# Altium PCB STM32F4VE.PcbDoc
Units mm, origin at the board's own origin, x right, y up, seen from the top; angles counter-clockwise.
Board outline 99 x 95.5 mm, 2 copper layers (Top Layer, Bottom Layer); 103 components, 124 nets, 470 pads, 0 vias.
Unrouted connection lines stored in the file: 314.
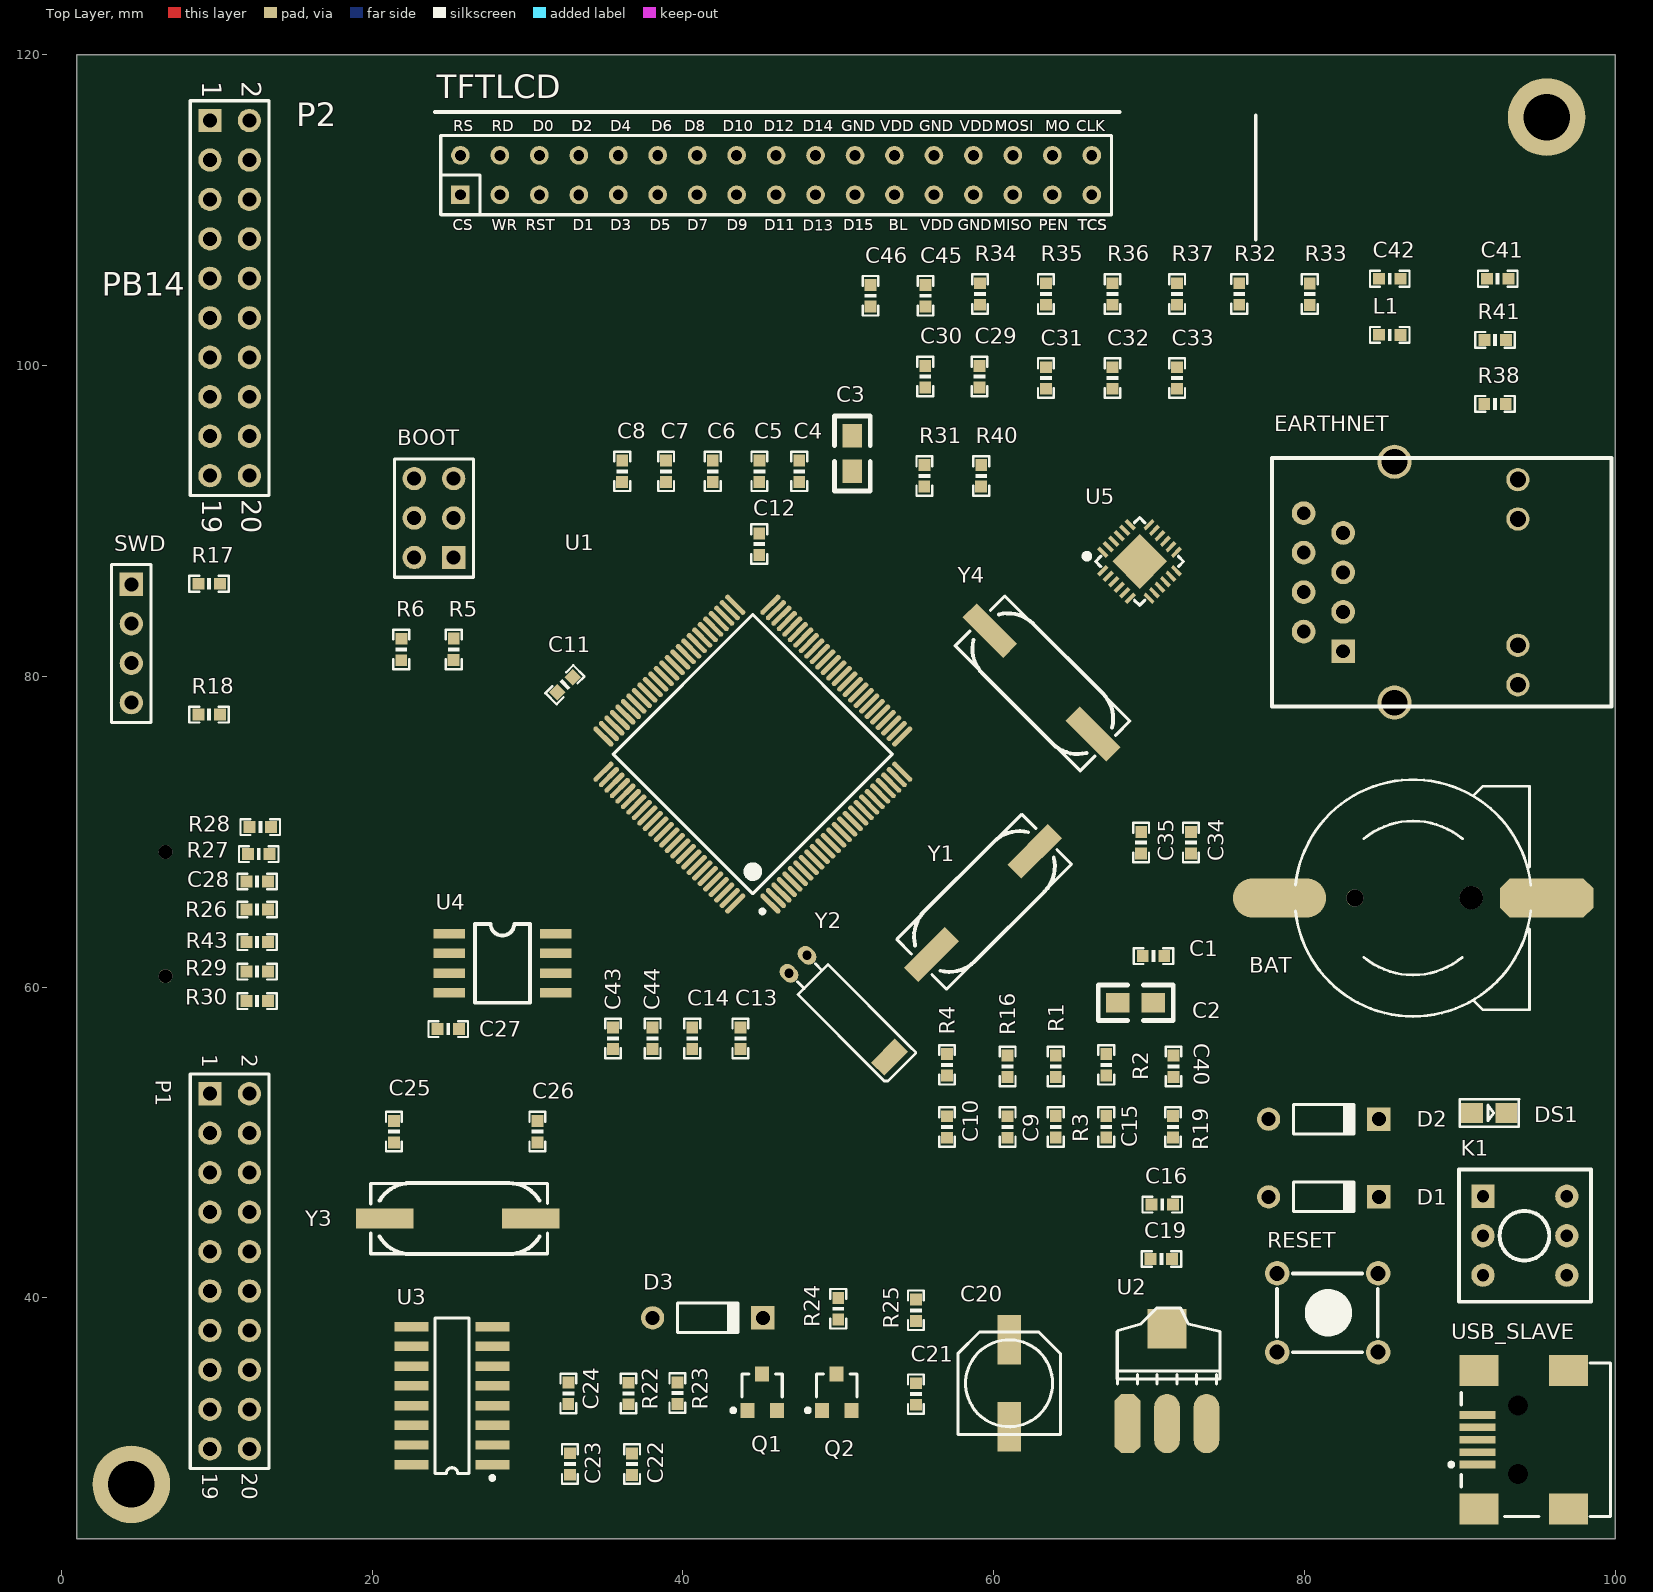
[diagram p0: Top Layer view]
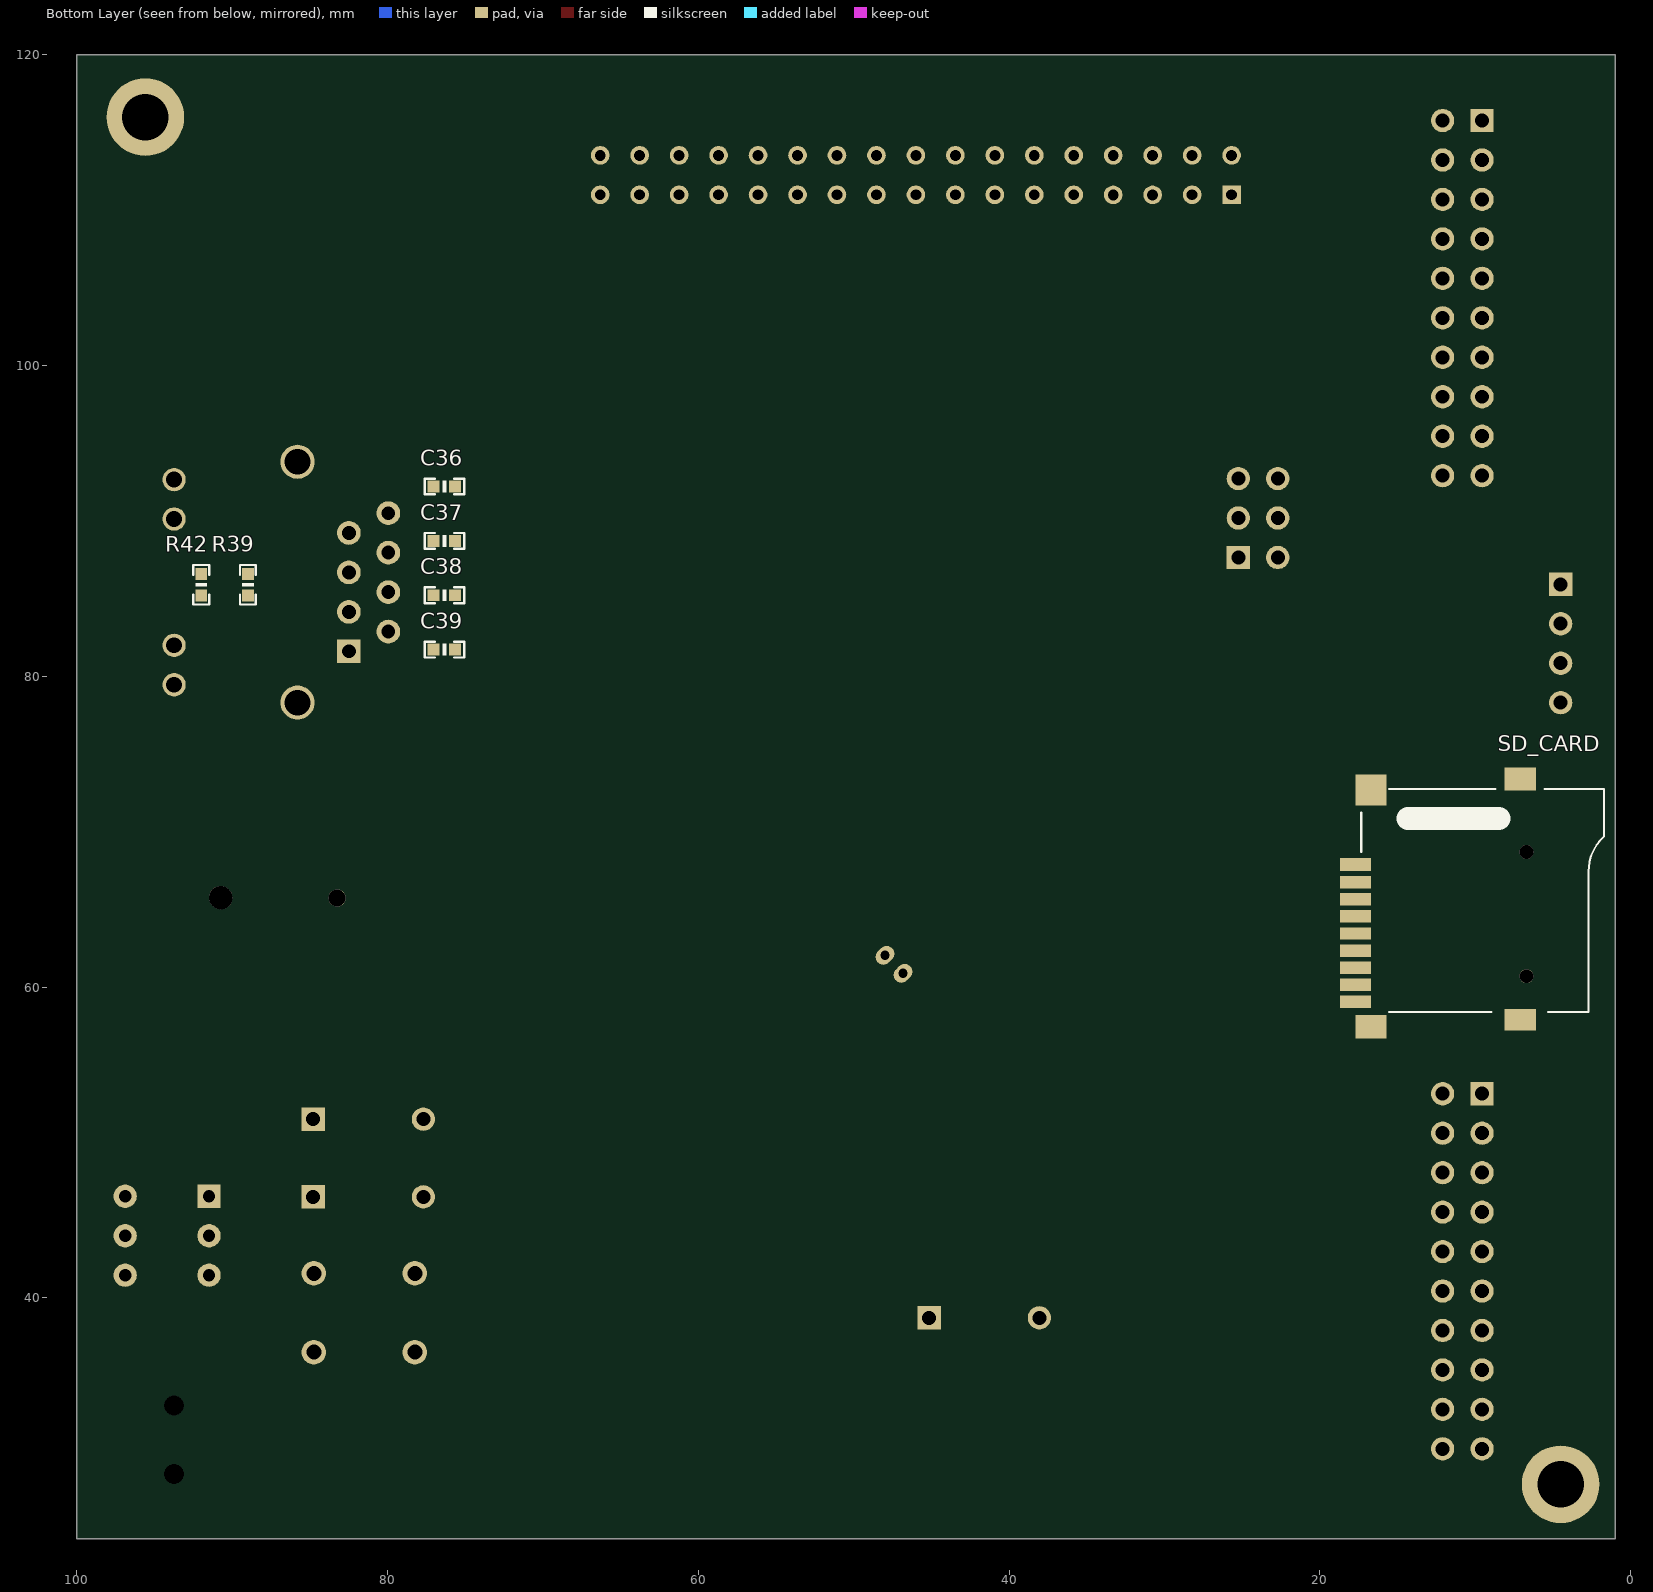
[diagram p1: Bottom Layer view, seen from below]

## Layer stack, top to bottom
Top Solder: solder mask 0.0102, Solder Resist, Dk 3.5
Top Layer: signal copper 0.0356
Dielectric 1: dielectric 0.32, FR-4, Dk 4.8
Bottom Layer: signal copper 0.0356
Bottom Solder: solder mask 0.0102, Solder Resist, Dk 3.5

## Board outline
1,24.5 100,24.5 100,120 1,120

## Design rules (kind name [scope] priority, off if disabled: settings)
Clearance [All] p1: gap=0.152 ignorepadtopadclearanceinfootprint=TRUE
HoleSize [All] p1: absolutevalues=TRUE maxlimit=2.54 minlimit=0.2 maxpercent=80.000 minpercent=20.000
PolygonConnect [All] p1: connectstyle=Relief reliefconductorwidth=0.254 reliefentries=4 polygonreliefangle="90 Angle" airgapwidth=0.254
RoutingVias [All] p1: holewidth=0.4 width=0.635 viastyle="Through Hole" minholewidth=0.3 minwidth=0.5 maxholewidth=0.711 maxwidth=1.27
SolderMaskExpansion [All] p1: expansion=0.102
UnRoutedNet [All] p1: checkbadconnections=TRUE
Width [All] p1: maxlimit=0.7 minlimit=0.127 preferedwidth=0.254
28 further rules are at their usual default settings.

## Components (designator, comment, footprint, x,y, rotation, side; value= is the part's Value field where it differs from the comment)
BAT "BATT" BATM 87,65.737 r90 top
BOOT "Header 3X2" HDR2X3 25.247,87.656 r90 top
C1 "104" 0603P 70.286,62 r0 top
C2 "106" 0805 68,59 r0 top
C3 "106" 0805 50.909,93.2 r90 top
C4 "104" 0603P 47.487,93.2 r90 top
C5 "104" 0603P 44.921,93.2 r90 top
C6 "104" 0603P 41.921,93.2 r90 top
C7 "104" 0603P 38.921,93.2 r90 top
C8 "104" 0603P 36.093,93.2 r90 top
C9 "22P" 0603P 60.902,51 r270 top
C10 "22P" 0603P 57.002,51 r270 top
C11 "106" 0603P 32.409,79.466 r45 top
C12 "106" 0603P 44.921,88.514 r270 top
C13 "12P" 0603P 43.7,56.7 r90 top
C14 "12P" 0603P 40.6,56.7 r90 top
C15 "104" 0603P 67.251,51 r90 top
C16 "104" 0603P 70.855,46 r0 top
C19 "104" 0603P 70.807,42.5 r180 top
C20 "220uF" CC6.56.5 61,34.5 r270 top
C21 "104" 0603P 55,33.8 r90 top
C22 "104" 0603P 36.731,29.3 r270 top
C23 "10UF" 0603P 32.728,29.3 r90 top
C24 "104" 0603P 32.626,33.85 r90 top
C25 "22P" 0603P 21.4,50.7 r270 top
C26 "22P" 0603P 30.637,50.7 r270 top
C27 "104" 0603P 24.9,57.3 r180 top
C28 "104" 0603P 12.6,66.8 r0 top
C29 "104" 0603P 59.097,99.3 r270 top
C30 "10UF" 0603P 55.598,99.3 r270 top
C31 "104" 0603P 63.367,99.2 r90 top
C32 "104" 0603P 67.65,99.2 r90 top
C33 "104" 0603P 71.811,99.2 r90 top
C34 "22P" 0603P 72.7,69.3 r270 top
C35 "22P" 0603P 69.5,69.3 r270 top
C36 "10" 0603P 76.346,92.222 r0 bottom
C37 "10" 0603P 76.346,88.722 r0 bottom
C38 "10" 0603P 76.346,85.222 r0 bottom
C39 "10" 0603P 76.346,81.722 r0 bottom
C40 "223" 0603P 71.579,54.9 r90 top
C41 "104" 0603P 92.449,105.591 r180 top
C42 "10UF" 0603P 85.5,105.593 r180 top
C43 "104" 0603P 35.5,56.7 r90 top
C44 "104" 0603P 38.05,56.7 r90 top
C45 "104" 0603P 55.617,104.5 r270 top
C46 "104" 0603P 52.081,104.5 r270 top
D1 "Diode 1N4148" DO-35 81.251,46.498 r0 top
D2 "Diode 1N4148" DO-35 81.251,51.5 r0 top
D3 "Diode 1N4148" DO-35 41.6,38.714 r0 top
DS1 "LED1" SMDLED 90.799,51.902 r0 top
EARTHNET "RJ45" HR911105A 88.85,86.066 r270 top
K1 "BUTTON" BTN8.5*8.5 91.5,46.54 r0 top
L1 "220R,2.0A,0.05DCR" 0603P 85.5,101.986 r0 top
P1 "Header 10X2" HDR2X10 9.56,53.14 r270 top
P2 "Header 10X2" HDR2X10 9.56,115.78 r270 top
Q1 "S8050" SOT-23R 45.1,33.8 r0 top
Q2 "S8550" SOT-23R 49.9,33.8 r0 top
R1 "0R" 0603P 64,54.9 r90 top
R2 "0R" 0603P 67.251,55 r90 top
R3 "0R" 0603P 64,51 r90 top
R4 "1M" 0603P 57,55 r90 top
R5 "10K" 0603P 25.247,81.741 r90 top
R6 "10K" 0603P 21.879,81.741 r270 top
R16 "10K" 0603P 60.9,54.9 r90 top
R17 "10K" 0603P 9.5,85.964 r0 top
R18 "10K" 0603P 9.5,77.541 r0 top
R19 "2k" 0603P 71.545,50.998 r90 top
R22 "1K" 0603P 36.501,33.85 r270 top
R23 "10K" 0603P 39.65,33.875 r270 top
R24 "1K" 0603P 50,39.3 r90 top
R25 "1K" 0603P 55.002,39.2 r270 top
R26 "10K" 0603P 12.6,65 r0 top
R27 "10K" 0603P 12.7,68.565 r0 top
R28 "10K" 0603P 12.8,70.3 r0 top
R29 "10K" 0603P 12.6,61 r0 top
R30 "10K" 0603P 12.6,59.1 r0 top
R31 "510R" 0603P 55.54,92.9 r90 top
R32 "12K" 0603P 75.811,104.621 r270 top
R33 "10K" 0603P 80.351,104.607 r270 top
R34 "49.9R" 0603P 59.123,104.607 r90 top
R35 "49.9R" 0603P 63.365,104.607 r90 top
R36 "49.9R" 0603P 67.65,104.609 r90 top
R37 "49.9R" 0603P 71.809,104.609 r90 top
R38 "10K" 0603P 92.276,97.54 r180 top
R39 "10K" 0603P 89,85.898 r90 bottom
R40 "1M" 0603P 59.2,92.9 r90 top
R41 "510R" 0603P 92.276,101.663 r0 top
R42 "510R" 0603P 92,85.898 r270 bottom
R43 "10K" 0603P 12.6,62.9 r0 top
RESET "KEY_M" KEY_M 78.251,41.58 r0 top
SD_CARD "Component_1" TF_SD 17.7,67.9 r270 bottom
SWD "Header 4" HDR1X4 4.5,85.93 r270 top
TFTLCD "TFT_LCD" TFT_LCD 385.418,-186.401 r0 top
U1 "STM32F4VE" LQFP100 44.5,75 r135 top
U2 "AMS1117-3.3" AMS1117 68.622,31.906 r0 top
U3 "CH340G" SOP16M 25.137,33.7 r90 top
U4 "W25Q128" SOIC-8 24.956,63.442 r0 top
U5 "LAN8720A" QFN24 69.4,87.4 r45 top
USB_SLAVE "USB-B(Mini)" USB/SM0.8-6H5 99,30.865 r0 top
Y1 "8MHz" 49S_SMD 56,62.1 r45 top
Y2 "32.768KHz" JZ32768 47.992,62.046 r225 top
Y3 "12MHz" 49S_SMD 20.802,45.1 r0 top
Y4 "25MHz" 49S_SMD 59.755,82.945 r315 top

## Footprints (in the part's own frame and the unit in brackets; to place one, negate y for a bottom-side part, rotate by r counter-clockwise, add the part's x,y. Pads: shape width x height; smd on the part's side, far side on the other; paste and mask are expansions set on the pad)
49S_SMD [mil]
  rect 146x51 smd: 1(0,0) 2(370,0)
  silkscreen extent -35,-90 413,90
0603P [mil]
  rect 30x30 smd: 1(-27,0) 2(27.5,-0.06)
  silkscreen extent -50,-20 50,20
0805 [mil]
  rect 60x50 smd: 1(0,-0.06) 2(90,-0.06)
  silkscreen extent -50,-45 140,45
AMS1117 [mil]
  oct 65x150 smd: 1(0.03,-0.06)
  oval 65x150 smd: 2(100.03,-0.06) 3(200.03,-0.06)
  rect 100x100 smd: 4(100.03,239.94)
  silkscreen extent -26,100 234,293
BATM [mm]
  round 1.1 hole 1.1 unplated: 0(0,3.748)
  round 1.5 hole 1.5 unplated: 0(0.025,-3.752)
  oct 2.5x6 smd: 1(0,-8.602)
  oval 2.5x6 smd: 2(0,8.598)
  silkscreen extent -7.62,-7.58 7.62,7.57
BTN8.5*8.5 [mm]
  rect 1.5x1.5 hole 0.8: 1(0,0)
  round 1.5 hole 0.8: 2(0,-2.54) 3(0,-5.08) 4(5.4,-5.08) 5(5.4,-2.54) 6(5.4,0)
  silkscreen extent -1.55,-6.79 6.95,1.71
CC6.56.5 [mm]
  rect 3.2x1.5 smd: 1(-2.794,0) 2(2.8,0)
  silkscreen extent -3.3,-3.3 3.3,3.3
DO-35 [mm] "Diode, Axial; Body 3.8 x 1.9 mm (LxDia. max), Lead Dia. 0.53 mm (max)"
  round 1.5 hole 0.9: 1(-3.55,0)
  rect 1.5x1.5 hole 0.9: 2(3.55,0)
  silkscreen extent -1.95,-0.95 2.05,0.95
HDR1X4 [mm]
  rect 1.5x1.5 hole 0.9: 1(0,0)
  round 1.5 hole 0.9: 2(2.54,0) 3(5.08,0) 4(7.62,0)
  silkscreen extent -1.27,-1.27 8.89,1.27
HDR2X3 [mm]
  rect 1.5x1.5 hole 0.9: 1(0,0)
  round 1.5 hole 0.9: 2(0,2.54) 3(2.54,0) 4(2.54,2.54) 5(5.08,0) 6(5.08,2.54)
  silkscreen extent -1.27,-1.27 6.35,3.81
HDR2X10 [mm] "Connector; Header; 10x2 Position"
  rect 1.5x1.5 hole 0.9: 1(0,0)
  round 1.5 hole 0.9: 2(0,2.54) 3(2.54,0) 4(2.54,2.54) 5(5.08,0) 6(5.08,2.54) 7(7.62,0) 8(7.62,2.54) 9(10.16,0) 10(10.16,2.54) 11(12.7,0) 12(12.7,2.54) 13(15.24,0) 14(15.24,2.54) 15(17.78,0) 16(17.78,2.54) 17(20.32,0) 18(20.32,2.54) 19(22.86,0) 20(22.86,2.54)
  silkscreen extent -1.27,-1.27 24.13,3.81
HR911105A [mil]
  rect 60x60 hole 35: 1(175.2,-250)
  round 60 hole 35: 2(125.2,-350) 3(75.2,-250) 4(25.2,-350) 5(-24.8,-250) 6(-74.8,-350) 7(-124.8,-250) 8(-174.8,-350)
  round 59.06 hole 40.16: 9(259.84,192.91) 12(-259.84,192.91)
  round 59.05 hole 40.16: 10(160,192.91) 11(-160,192.91)
  round 86.61 hole 64.96: 13(305.12,-120) 14(-305.12,-120)
  silkscreen extent -315,-430 315,430
JZ32768 [mm]
  oval 1x1.3 hole 0.6: 1(0,0) 2(1.64,0)
  rect 2.2x1.2 smd: 3(0.875,8.382)
  silkscreen extent -0.53,0.76 2.2,9.4
KEY_M [mil]
  round 62 hole 38: 1(0,0) 1(255.91,0) 2(0,-200) 2(255.91,-200)
  silkscreen extent 0,-200 255,0
LQFP100 [mm] "LQFP, 100-Leads, Body 16.2x16.2mm (max), Pitch 0.50mm, IPC Medium Density"
  oval 1.7x0.33 smd: 1(-7.6,6) 2(-7.6,5.5) 3(-7.6,5) 4(-7.6,4.5) 5(-7.6,4) 6(-7.6,3.5) 7(-7.6,3) 8(-7.6,2.5) 9(-7.6,2) 10(-7.6,1.5) 11(-7.6,1) 12(-7.6,0.5) 13(-7.6,0) 14(-7.6,-0.5) 15(-7.6,-1) 16(-7.6,-1.5) 17(-7.6,-2) 18(-7.6,-2.5) 19(-7.6,-3) 20(-7.6,-3.5) 21(-7.6,-4) 22(-7.6,-4.5) 23(-7.6,-5) 24(-7.6,-5.5) 25(-7.6,-6) 51(7.6,-6) 52(7.6,-5.5) 53(7.6,-5) 54(7.6,-4.5) 55(7.6,-4) 56(7.6,-3.5) 57(7.6,-3) 58(7.6,-2.5) 59(7.6,-2) 60(7.6,-1.5) 61(7.6,-1) 62(7.6,-0.5) 63(7.6,0) 64(7.6,0.5) 65(7.6,1) 66(7.6,1.5) 67(7.6,2) 68(7.6,2.5) 69(7.6,3) 70(7.6,3.5) 71(7.6,4) 72(7.6,4.5) 73(7.6,5) 74(7.6,5.5) 75(7.6,6)
  oval 0.33x1.7 smd: 26(-6,-7.6) 27(-5.5,-7.6) 28(-5,-7.6) 29(-4.5,-7.6) 30(-4,-7.6) 31(-3.5,-7.6) 32(-3,-7.6) 33(-2.5,-7.6) 34(-2,-7.6) 35(-1.5,-7.6) 36(-1,-7.6) 37(-0.5,-7.6) 38(0,-7.6) 39(0.5,-7.6) 40(1,-7.6) 41(1.5,-7.6) 42(2,-7.6) 43(2.5,-7.6) 44(3,-7.6) 45(3.5,-7.6) 46(4,-7.6) 47(4.5,-7.6) 48(5,-7.6) 49(5.5,-7.6) 50(6,-7.6) 76(6,7.6) 77(5.5,7.6) 78(5,7.6) 79(4.5,7.6) 80(4,7.6) 81(3.5,7.6) 82(3,7.6) 83(2.5,7.6) 84(2,7.6) 85(1.5,7.6) 86(1,7.6) 87(0.5,7.6) 88(0,7.6) 89(-0.5,7.6) 90(-1,7.6) 91(-1.5,7.6) 92(-2,7.6) 93(-2.5,7.6) 94(-3,7.6) 95(-3.5,7.6) 96(-4,7.6) 97(-4.5,7.6) 98(-5,7.6) 99(-5.5,7.6) 100(-6,7.6)
  silkscreen extent -7.72,-6.35 6.35,6.85, body extent -7.05,-7.05 7.05,7.05, height 1.6
QFN24 [mm]
  rect 0.8x0.25 smd: 1(-2.101,1.25) 2(-2.101,0.75) 3(-2.101,0.25) 4(-2.101,-0.25) 5(-2.101,-0.75) 6(-2.101,-1.25) 13(2.101,-1.25) 14(2.101,-0.75) 15(2.101,-0.25) 16(2.101,0.25) 17(2.101,0.75) 18(2.101,1.25)
  rect 0.25x0.8 smd: 7(-1.25,-2.101) 8(-0.75,-2.101) 9(-0.25,-2.101) 10(0.25,-2.101) 11(0.75,-2.101) 12(1.25,-2.101) 19(1.25,2.101) 20(0.75,2.101) 21(0.25,2.101) 22(-0.25,2.101) 23(-0.75,2.101) 24(-1.25,2.101)
  rect 2.5x2.5 smd: 25(0,0)
  silkscreen extent -2.31,-2 2,2.79
SMDLED [mm]
  rect 1.4x1.27 smd: 1(0.001,-0.002) 2(2.211,-0.002)
  silkscreen extent -0.8,-0.89 3.01,0.89
SOIC-8 [mil]
  rect 80x24 smd: 1(0,0) 2(0,-50.06) 3(0,-100.06) 4(0,-150.06) 5(270,-150) 6(270,-100) 7(270,-50) 8(270,0)
  silkscreen extent 65,-175 205,25
SOP16M [mm]
  rect 0.6x2.2 smd: 1(-4.445,-2.6) 2(-3.175,-2.6) 3(-1.905,-2.6) 4(-0.635,-2.6) 5(0.635,-2.6) 6(1.905,-2.6) 7(3.175,-2.6) 8(4.445,-2.6) 9(4.445,2.6) 10(3.175,2.6) 11(1.905,2.6) 12(0.635,2.6) 13(-0.635,2.6) 14(-1.905,2.6) 15(-3.175,2.6) 16(-4.445,2.6)
  silkscreen extent -5.42,-2.72 5,1.1
SOT-23R [mm]
  rect 0.9x0.95 smd: 1(0.95,-1.048) 2(-0.95,-1.048) 3(0,1.302)
  silkscreen extent -1.98,-1.17 1.3,1.3
TF_SD [mm]
  round 0.9 hole 0.9 unplated: 0(-0.8,11) 0(7.2,11)
  rect 0.85x2 smd: 1(0,0)
  rect 0.8x2 smd: 2(1.15,0) 3(2.25,0) 4(3.35,0) 5(4.45,0) 6(5.55,0) 7(6.65,0) 8(7.75,0) 9(8.85,0)
  rect 1.5x2 smd: 10(-5.5,10.6) 10(10.45,1)
  rect 2x2 smd: 10(-4.8,1)
  rect 1.4x2 smd: 10(10,10.6)
  silkscreen extent -4.86,0.36 9.49,16
TFT_LCD [mm]
  rect 1.2x1.2 hole 0.7: 1(-359.738,297.401)
  round 1.2 hole 0.7: 2(-359.738,299.941) 3(-357.198,297.401) 4(-357.198,299.941) 5(-354.657,297.395) 6(-354.658,299.941) 7(-352.117,297.395) 8(-352.117,299.935) 9(-349.578,297.401) 10(-349.578,299.941) 11(-347.038,297.401) 12(-347.038,299.941) 13(-344.498,297.401) 14(-344.498,299.941) 15(-341.958,297.401) 16(-341.958,299.941) 17(-339.418,297.401) 18(-339.418,299.941) 19(-336.878,297.401) 20(-336.878,299.941) 21(-334.338,297.401) 22(-334.338,299.941) 23(-331.798,297.401) 24(-331.798,299.941) 25(-329.258,297.401) 26(-329.258,299.941) 27(-326.718,297.401) 28(-326.718,299.941) 29(-324.178,297.401) 30(-324.178,299.941) 31(-321.638,297.401) 32(-321.638,299.941) 33(-319.098,297.401) 34(-319.098,299.941)
  silkscreen extent -361.39,294.51 -308.54,302.73
USB/SM0.8-6H5 [mm]
  rect 2.3x0.5 smd: 1(-7.85,-1.6) 2(-7.85,-0.8) 3(-7.85,0) 4(-7.85,0.8) 5(-7.85,1.6)
  rect 2.5x2 smd: 6(-7.75,4.45) 7(-1.996,4.45) 8(-7.75,-4.45) 9(-1.996,-4.45)
  round 0.6 hole 1.27 unplated: MH1(-5.25,2.2) MH2(-5.25,-2.2)
  silkscreen extent -9.67,-4.95 0.7,4.95

## Part data
BAT: library part BAT
BOOT: "Header, 3-Pin, Dual row", LatestRevisionDate=17-Jul-2002, LatestRevisionNote="Re-released for DXP Platform.", Publisher="Altium Limited"
C1 C2 C3 C4 C5 C6 C7 C8 C9 C10 C11 C12 C13 C14 C15 C16 C19 C21 C22 C23 C24 C25 C26 C27 C28 C29 C30 C31 C32 C33 C34 C35 C36 C37 C38 C39 C40 C41 C42 C43 C44 C45 C46: library part C
C20: library part CAP
D1 D2 D3: "High Conductance Fast Diode", Code_JEDEC=DO-204-AH, ComponentLink1Description="Manufacturer Link", ComponentLink1URL=http://www.fairchildsemi.com/, ComponentLink2Description=Datasheet, ComponentLink2URL=http://www.fairchildsemi.com/ds/1N%2F1N4148.pdf, DatasheetVersion=1997, LatestRevisionDate=17-Jul-2002, LatestRevisionNote="Re-released for DXP Platform.", PackageDescription="Diode, Axial; Body 3.8 x 1.9 mm (LxDia. max), Lead Dia. 0.53 mm (max)", PackageReference=DO-35, Published=8-Jun-2000, Publisher="Altium Limited"
DS1: library part LED2, "Typical RED, GREEN, YELLOW, AMBER GaAs LED", PackageDocument=Feb-2002, LatestRevisionDate=17-Jul-2002, LatestRevisionNote="Re-released for DXP Platform.", PackageReference=3.2X1.6X1.1, Published=8-Jun-2000, Publisher="Altium Limited"
EARTHNET: library part HR911105
L1: library part L
P1 P2: "Header, 10-Pin, Dual row", LatestRevisionDate=17-Jul-2002, LatestRevisionNote="Re-released for DXP Platform.", Publisher="Altium Limited"
Q1: library part NPN, "8050/BCW846/BCW847"
Q2: library part PNP, "8550/BCW68"
R1 R2 R3 R4 R5 R6 R16 R17 R18 R19 R22 R23 R24 R25 R26 R27 R28 R29 R30 R31 R32 R33 R34 R35 R36 R37 R38 R39 R40 R41 R42 R43: library part R
SWD: "Header, 4-Pin", LatestRevisionDate=17-Jul-2002, LatestRevisionNote="Re-released for DXP Platform.", Publisher="Altium Limited"
U2: library part AMS1117
U3: "USB2UART"
U4: library part W25X16, "W25X16;SST25VF016;MX25L1605"
U5: library part LAN8720, "ETH PHY"
USB_SLAVE: library part USB5
Y1 Y2 Y3 Y4: library part XTAL, "Crystal Oscillator", LatestRevisionDate=17-Jul-2002, LatestRevisionNote="Re-released for DXP Platform.", Published=8-Jun-2000, Publisher="Altium Limited"

## Free pads (board coordinates)
  round 5 hole 3: 1(95.602,116) 2(4.5,28)

## Nets (pads, with @x,y where several pads share a name; then routed paths per layer and width w, separated by ;. In a path a pad name is that pad's centre, name@x,y a point inside that pad or via, vN(x,y) a via of type N, cw(c..) or ccw(c..) an arc to the next point about the centre after c; other vN are vias at no path point)
3V3: BOOT.1 BOOT.2 C20.1 C21.2 C27.1 C28.2 C31.2 C41.2 C46.1 D1.1 L1.2 P2.7 P2.8 Q2.1 R3.1 R16.1 R17.1 R23.2 R26.2 R27.2 R28.2 R29.2 R30.2 R43.2 SD_CARD.4 SWD.1 TFTLCD.24 TFTLCD.25 U1.11 U1.28 U1.50 U1.75 U1.100 U2.2 U2.4 U4.3 U4.7 U4.8 U5.9
3V3_E: C32.2 C33.2 C40.2 C42.2 EARTHNET.4 EARTHNET.5 L1.1 R34.2 R35.2 R36.2 R37.2 U5.1 U5.19
5V: C19.1 C22.2 C23.1 C43.2 C44.2 C45.1 K1.2 K1.5 P1.2 P2.1 P2.2 R19.2 TFTLCD.28 U2.3 U3.16
BOOT0: R5.1 R25.1 U1.94
BOOT1: R6.2 U1.37
D+: U3.5 USB_SLAVE.3
D-: U3.6 USB_SLAVE.2
DCMI_D0: P1.1 U1.63
DCMI_D1: P1.3 U1.64
DCMI_D2: P1.5 U1.97
DCMI_D3: P1.7 U1.98
DCMI_D4: P1.9 U1.3
DCMI_D5: P1.11 U1.92
DCMI_D6: P1.13 U1.4
DCMI_D7: P1.15 U1.5
DCMI_HR: P1.18 U1.29
DCMI_PCLK: P1.10 U1.31
DCMI_VS: P1.12 U1.93
ETH_MDC: U1.16 U5.13
ETH_MDIO: R31.1 U1.25
ETH_RESET: R33.2 U1.15 U5.15
F_CS: U1.89 U4.1
FSMC_A16: TFTLCD.2 U1.58
FSMC_D0: TFTLCD.6 U1.61
FSMC_D1: TFTLCD.7 U1.62
FSMC_D2: TFTLCD.8 U1.81
FSMC_D3: TFTLCD.9 U1.82
FSMC_D4: TFTLCD.10 U1.38
FSMC_D5: TFTLCD.11 U1.39
FSMC_D6: TFTLCD.12 U1.40
FSMC_D7: TFTLCD.13 U1.41
FSMC_D8: TFTLCD.14 U1.42
FSMC_D9: TFTLCD.15 U1.43
FSMC_D10: TFTLCD.16 U1.44
FSMC_D11: TFTLCD.17 U1.45
FSMC_D12: TFTLCD.18 U1.46
FSMC_D13: TFTLCD.19 U1.55
FSMC_D14: TFTLCD.20 U1.56
FSMC_D15: TFTLCD.21 U1.57
FSMC_NE1: TFTLCD.1 U1.88
FSMC_NOE: TFTLCD.4 U1.85
FSMC_NWE: TFTLCD.3 U1.86
GND: BAT.2 BOOT.5 BOOT.6 C3.1 C4.1 C5.1 C6.1 C7.1 C8.1 C9.2 C10.2 C11.1 C12.1 C13.1 C14.1 C15.1 C16.1 C19.2 C20.2 C21.1 C22.1 C23.2 C24.1 C25.1 C26.1 C27.2 C28.1 C29.1 C30.1 C31.1 C32.1 C33.1 C34.2 C35.2 C36.1 C37.1 C38.1 C39.1 C40.1 C41.1 C42.1 C43.1 C44.1 C45.2 C46.2 DS1.2 EARTHNET.8 EARTHNET.13 EARTHNET.14 P1.20 P2.3 P2.4 P2.5 P2.6 R2.1 R18.1 R32.1 R33.1 R38.2 R39.2 R41.1 R42.1 RESET.2 SD_CARD.6 SD_CARD.9 SWD.4 TFTLCD.22 TFTLCD.26 TFTLCD.27 U1.10 U1.27 U1.74 U1.99 U2.1 U3.1 U4.4 U5.25 USB_SLAVE.5
I2C_SCL: P1.17 U1.95
I2C_SDA: P1.19 U1.96
LCD_BL: TFTLCD.23 U1.71
LINK_LED: EARTHNET.12 R38.1 U5.3
NetBAT_1: BAT.1 D2.1
NetBOOT_3: BOOT.3 R5.2
NetBOOT_4: BOOT.4 R6.1
NetC1_1: C1.1 C2.1 R2.2 U1.20
NetC9_1: C9.1 R4.2 U1.13 Y1.2
NetC10_1: C10.1 R4.1 U1.12 Y1.1
NetC11_2: C11.2 U1.73
NetC12_2: C12.2 U1.49
NetC13_2: C13.2 U1.9 Y2.1
NetC14_2: C14.2 U1.8 Y2.2
NetC24_2: C24.2 U3.4
NetC25_2: C25.2 U3.7 Y3.1
NetC26_2: C26.2 U3.8 Y3.2
NetC29_2: C29.2 C30.2 U5.6
NetC34_1: C34.1 R40.1 U5.4 Y4.1
NetC35_1: C35.1 R40.2 U5.5 Y4.2
NetD3_2: D3.2 Q1.3 R23.1
NetDS1_1: DS1.1 R19.1
NetEARTHNET_10: EARTHNET.10 R42.2
NetEARTHNET_11: EARTHNET.11 R41.2
NetQ1_1: Q1.1 R24.1 U3.14
NetQ1_2: Q1.2 R22.2
NetQ2_2: Q2.2 R24.2
NetQ2_3: Q2.3 R25.2
NetR1_2: R1.2 U1.21
NetR22_1: R22.1 U3.13
NetR31_2: R31.2 U5.12
NetR32_2: R32.2 U5.24
PA0: P2.12 U1.23
PA15: P2.17 U1.77
PB10: P2.10 U1.47
PB14: P2.9 U1.53
PB15: P2.11 U1.54
PC2: P2.16 U1.17
PC3: P2.14 U1.18
PC13: P2.18 U1.7
PD3: P2.19 U1.84
PD6: P2.20 U1.87
PD12: P2.13 U1.59
PD13: P2.15 U1.60
PWDN: P1.4 U1.1
RESET: C16.2 D3.1 R16.2 RESET.1 TFTLCD.5 U1.14
RMII_CRS_DV: U1.32 U5.11
RMII_REF_CLK: U1.24 U5.14
RMII_RXD0: U1.33 U5.8
RMII_RXD1: U1.34 U5.7
RMII_TX_EN: U1.48 U5.16
RMII_TXD0: U1.51 U5.17
RMII_TXD1: U1.52 U5.18
RST: P1.6 U1.2
RXD: U1.68 U3.3
SDIO_CMD: R26.1 SD_CARD.3 U1.83
SDIO_D0: R29.1 SD_CARD.7 U1.65
SDIO_D1: R30.1 SD_CARD.8 U1.66
SDIO_D2: R28.1 SD_CARD.1 U1.78
SDIO_D3: R27.1 SD_CARD.2 U1.79
SDIO_SCK: R43.1 SD_CARD.5 U1.80
SPEED_LED: EARTHNET.9 R39.1 U5.2
SPI1_MISO: U1.90 U4.2
SPI1_MOSI: U1.91 U4.5
SPI1_SCK: U1.30 U4.6
SWCLK: R18.2 SWD.3 U1.76
SWDIO: R17.2 SWD.2 U1.72
T_CS: TFTLCD.33 U1.70
T_MISO: TFTLCD.29 U1.35
T_MOSI: TFTLCD.30 U1.36
T_PEN: TFTLCD.31 U1.67
T_SCK: TFTLCD.34 U1.26
TPRX+: C37.2 EARTHNET.3 R36.1 U5.23
TPRX-: C36.2 EARTHNET.6 R37.1 U5.22
TPTX+: C39.2 EARTHNET.1 R34.1 U5.21
TPTX-: C38.2 EARTHNET.2 R35.1 U5.20
TXD: U1.69 U3.2
VBAT: C15.2 D1.2 D2.2 U1.6
VCC: C3.2 C4.2 C5.2 C6.2 C7.2 C8.2
VDDA: C1.2 C2.2 R1.1 R3.2 U1.19 U1.22
VUSB: K1.3 USB_SLAVE.1
pads on no net: BAT.0 EARTHNET.7 K1.1 K1.4 K1.6 P1.8 P1.14 P1.16 SD_CARD.0 SD_CARD.10 TFTLCD.32 U3.9 U3.10 U3.11 U3.12 U3.15 U5.10 USB_SLAVE.4 USB_SLAVE.6 USB_SLAVE.7 USB_SLAVE.8 USB_SLAVE.9 USB_SLAVE.MH1 USB_SLAVE.MH2 Y2.3

## Silkscreen, mask and mechanical layers (free items; w line width, h text height)
Top Overlay:
  text "PB14" at 2.6,104.5 h1.52
Mechanical 1:
  lines w0.254: 0.873,24.5 ccw(c1,24.5) 1,24.373 ; 0.873,24.5 ccw(c1,24.5) 1,24.373 ; 0.873,24.5 0.873,120 ; 0.873,120 cw(c1,120) 1,120.127 ; 0.873,120 cw(c1,120) 1,120.127 ; 1,24.373 100,24.373 ; 1,120.127 100,120.127 ; 100,24.373 ccw(c100,24.5) 100.127,24.5 ; 100,24.373 ccw(c100,24.5) 100.127,24.5 ; 100,120.127 cw(c100,120) 100.127,120 ; 100,120.127 cw(c100,120) 100.127,120 ; 100.127,24.5 100.127,120

## Text inside footprints (layer, text, board x,y; h text height)
P1: Top Overlay "20" at 11.592,28.756 h1 r270; Top Overlay "19" at 9.052,28.756 h1 r270; Top Overlay "1" at 9.052,55.68 h1 r270; Top Overlay "2" at 11.592,55.68 h1 r270
P2: Top Overlay "2" at 11.592,118.32 h1.27 r270; Top Overlay "1" at 9.052,118.32 h1.27 r270; Top Overlay "19" at 9.052,91.396 h1.27 r270; Top Overlay "20" at 11.592,91.396 h1.27 r270
TFTLCD: Top Overlay "BL" at 53.241,108.708 h0.71; Top Overlay "MISO" at 59.972,108.708 h0.71; Top Overlay "TCS" at 65.433,108.708 h0.71; Top Overlay "MO" at 63.332,115.094 h0.71; Top Overlay "MOSI" at 60.082,115.094 h0.71; Top Overlay "CLK" at 65.332,115.094 h0.71; Top Overlay "PEN" at 62.893,108.708 h0.71; Top Overlay "D11" at 45.24,108.708 h0.71; Top Overlay "GND" at 57.686,108.708 h0.71; Top Overlay "GND" at 50.207,115.094 h0.71; Top Overlay "RD" at 27.707,115.094 h0.71; Top Overlay "D0" at 30.332,115.094 h0.71; Top Overlay "D10" at 42.582,115.094 h0.71; Top Overlay "VDD" at 52.707,115.094 h0.71; Top Overlay "GND" at 55.207,115.094 h0.71; Top Overlay "VDD" at 57.832,115.094 h0.71; Top Overlay "VDD" at 55.273,108.708 h0.71; Top Overlay "D15" at 50.32,108.708 h0.71; Top Overlay "D12" at 45.207,115.094 h0.71; Top Overlay "D13" at 47.707,108.698 h0.71; Top Overlay "D9" at 42.827,108.708 h0.71; Top Overlay "D8" at 40.082,115.094 h0.71; Top Overlay "D6" at 37.957,115.094 h0.71; Top Overlay "D5" at 37.874,108.708 h0.71; Top Overlay "D4" at 35.332,115.094 h0.71; Top Overlay "D3" at 35.334,108.708 h0.71; Top Overlay "D2" at 32.832,115.094 h0.71; Top Overlay "D1" at 32.921,108.708 h0.71; Top Overlay "RST" at 29.873,108.708 h0.71; Top Overlay "WR" at 27.714,108.708 h0.71; Top Overlay "CS" at 25.174,108.708 h0.71; Top Overlay "RS" at 25.207,115.094 h0.71; Top Overlay "D7" at 40.287,108.708 h0.71; Top Overlay "D14" at 47.707,115.094 h0.71; Top Overlay "BL" at 53.239,108.714 h0.71; Top Overlay "MISO" at 59.97,108.714 h0.71; Top Overlay "TCS" at 65.431,108.714 h0.71; Top Overlay "MO" at 63.33,115.1 h0.71; Top Overlay "MOSI" at 60.08,115.1 h0.71; Top Overlay "CLK" at 65.33,115.1 h0.71; Top Overlay "PEN" at 62.891,108.714 h0.71; Top Overlay "D11" at 45.238,108.714 h0.71; Top Overlay "GND" at 57.684,108.714 h0.71; Top Overlay "GND" at 50.205,115.1 h0.71; Top Overlay "RD" at 27.705,115.1 h0.71; Top Overlay "D0" at 30.33,115.1 h0.71; Top Overlay "D10" at 42.58,115.1 h0.71; Top Overlay "VDD" at 52.705,115.1 h0.71; Top Overlay "GND" at 55.205,115.1 h0.71; Top Overlay "VDD" at 57.83,115.1 h0.71; Top Overlay "VDD" at 55.271,108.714 h0.71; Top Overlay "D15" at 50.318,108.714 h0.71; Top Overlay "D12" at 45.205,115.1 h0.71; Top Overlay "D9" at 42.825,108.714 h0.71; Top Overlay "D8" at 40.08,115.1 h0.71; Top Overlay "D6" at 37.955,115.1 h0.71; Top Overlay "D5" at 37.872,108.714 h0.71; Top Overlay "D4" at 35.33,115.1 h0.71; Top Overlay "D3" at 35.332,108.714 h0.71; Top Overlay "D2" at 32.83,115.1 h0.71; Top Overlay "D1" at 32.919,108.714 h0.71; Top Overlay "RST" at 29.871,108.714 h0.71; Top Overlay "WR" at 27.712,108.714 h0.71; Top Overlay "CS" at 25.172,108.714 h0.71; Top Overlay "RS" at 25.205,115.1 h0.71; Top Overlay "D7" at 40.285,108.714 h0.71; Top Overlay "D14" at 47.705,115.1 h0.71